# Altium PCB PCB1.PcbDoc (part 3 of 3)
Units mm, origin at the board's own origin, x right, y up, seen from the top; angles counter-clockwise.
Board outline 176 x 144.01 mm, 2 copper layers (Top Layer, Bottom Layer); 148 components, 189 nets, 767 pads, 256 vias.
Unrouted connection lines stored in the file: 30.
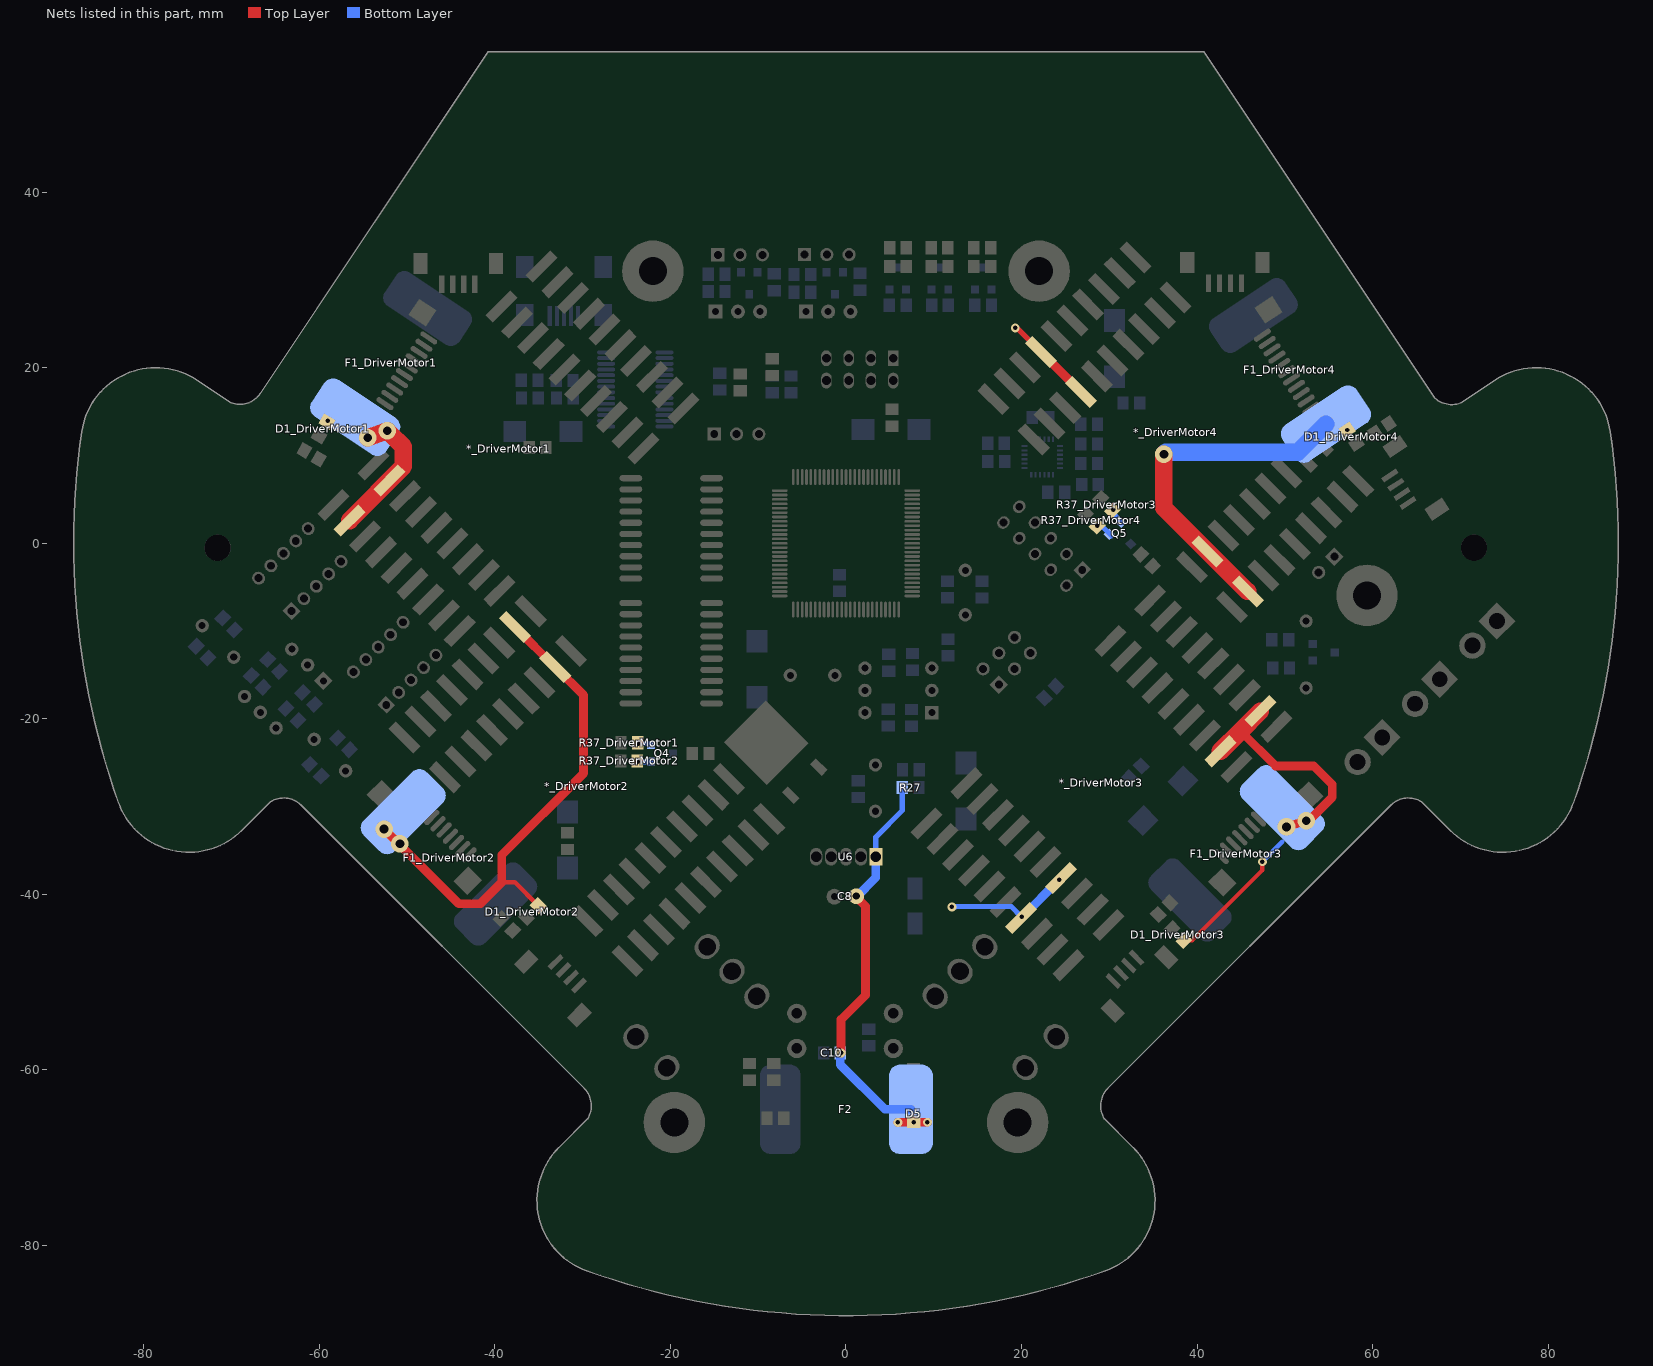
[diagram p3: the nets of this part, all layers, seen from the top]

## Via types
v1: diameter 1, hole 0.5, Top Layer to Bottom Layer, 225 vias
v2: diameter 2, hole 1, Top Layer to Bottom Layer, 17 vias
v3: diameter 1.27, hole 0.8, Top Layer to Bottom Layer, 12 vias
v4: diameter 1, hole 0.5, Top Layer to Bottom Layer, tented top, 1 vias
v5: diameter 1.27, hole 0.711, Top Layer to Bottom Layer, 1 vias

## Nets (pads, with @x,y where several pads share a name; then routed paths per layer and width w, separated by ;. In a path a pad name is that pad's centre, name@x,y a point inside that pad or via, vN(x,y) a via of type N, cw(c..) or ccw(c..) an arc to the next point about the centre after c; other vN are vias at no path point) (continued)
TWI_DATA_DriverMotor3: *_DriverMotor3.4 | length 14.9
  Bottom Layer w0.6: v1(12.065,-41.427) v1@12.471,-41.427 ; v1@12.065,-41.377 18.821,-41.377 v1(20.015,-42.57) v1@20.066,-42.57
  Bottom Layer w1: v1@20.066,-42.57 v1(24.308,-38.329)
TWI_DATA_DriverMotor4: *_DriverMotor4.4 | length 10.5
  Top Layer w0.6: v1(19.279,24.536) 19.478,24.536 *_DriverMotor4.4@22.193,21.822
  Top Layer w1: *_DriverMotor4.4@22.193,21.822 *_DriverMotor4.4@26.763,17.252
TX_DRIVER1: Q4.3 R37_DriverMotor1.2 | length 1.3
  Bottom Layer w0.5: v1(-23.688,-22.843) Q4.3@-22.416,-22.843
TX_DRIVER2: Q4.2 R37_DriverMotor2.2 | length 1.5
  Bottom Layer w0.6: v1(-23.723,-24.9) -22.238,-24.9 Q4.2@-22.211,-24.873
TX_DRIVER3: Q5.3 R37_DriverMotor3.2 | length 1.8
  Bottom Layer w0.6: v1(30.428,3.811) 30.428,3.377 Q5.3@31.405,2.399
TX_DRIVER4: Q5.2 R37_DriverMotor4.2 | length 2.1
  Bottom Layer w0.6: v1(28.632,1.979) 29.138,1.979 Q5.2@30.253,0.864
VDRIVER_DriverMotor1: *_DriverMotor1.12 D1_DriverMotor1.2 F1_DriverMotor1.1 | length 15.5
  Top Layer w2: *_DriverMotor1.12@-56.563,2.588 -56.563,2.631 -50.419,8.776 -50.419,10.998 v2@-51.968,12.548 ; v2(-54.483,12.014) v2(-52.273,12.827)
  other v1: -59.063,13.955
VDRIVER_DriverMotor2: *_DriverMotor2.12 D1_DriverMotor2.2 F1_DriverMotor2.1 | length 59.4
  Top Layer w0.5: -39.218,-38.633 -37.722,-38.633 D1_DriverMotor2.2@-35.066,-41.289
  Top Layer w1: v2(-52.629,-32.563) -44.12,-41.072 -41.656,-41.072 -39.218,-38.633 -39.218,-35.509 -29.896,-26.187 -29.896,-17.31 -33.109,-14.097 -33.152,-14.097 *_DriverMotor2.12@-37.696,-9.553
  other v2: -50.825,-34.239
VDRIVER_DriverMotor3: *_DriverMotor3.12 D1_DriverMotor3.2 F1_DriverMotor3.1 | length 43.8
  Top Layer w0.5: D1_DriverMotor3.2@38.492,-45.249 39.435,-45.249 47.447,-37.236 v1(47.447,-36.271)
  Top Layer w1: *_DriverMotor3.12@42.672,-23.711 *_DriverMotor3.12@42.672,-23.668 ; 44.955,-21.384 48.946,-25.375 53.289,-25.375 55.397,-27.483 55.397,-28.931 v2@52.502,-31.826 ; v2(50.19,-32.309) v2(52.451,-31.623)
  Top Layer w2: *_DriverMotor3.12@42.672,-23.668 44.955,-21.384 *_DriverMotor3.12@47.216,-19.124
  Bottom Layer w0.5: v1(47.447,-36.271) 49.708,-34.01
VDRIVER_DriverMotor4: *_DriverMotor4.12 D1_DriverMotor4.2 F1_DriverMotor4.1 | length 39.5
  Top Layer w2: v2(36.22,10.135) 36.22,4.051 45.73,-5.458 *_DriverMotor4.12@45.773,-5.458
  Bottom Layer w2: v2(36.22,10.135) 36.449,10.363 51.461,10.363 F1_DriverMotor4.1@54.676,13.579
  other v1: 57.106,12.906
VSS: C8.1 C10.2 D5.1 F2.1 R27.2 U6.1 | length 48.8
  Top Layer w1: v1(-0.559,-58.064) -0.559,-54.254 2.22,-51.476 2.22,-41.361 C8.1@1.168,-40.31 ; v1@5.918,-65.964 9.261,-65.964 v1(9.271,-65.954)
  Bottom Layer w0.6: U6.1@3.4,-35.712 3.4,-33.455 6.416,-30.439 R27.2@6.416,-27.838
  Bottom Layer w1: C10.2@-0.65,-58.064 -0.65,-59.395 4.445,-64.491 F2.1@7.4,-64.491 ; C8.1@1.168,-40.31 3.4,-38.078 U6.1@3.4,-35.712
  other v1: 5.918,-65.979 7.722,-65.964
pads on no net: *_DriverMotor1.6 *_DriverMotor2.6 *_DriverMotor3.6 *_DriverMotor4.6 BL1_DriverMotor1.0 BL1_DriverMotor2.0 BL1_DriverMotor3.0 BL1_DriverMotor4.0 encoder1_DriverMotor1.0 encoder1_DriverMotor2.0 encoder1_DriverMotor3.0 encoder1_DriverMotor4.0 J1.4 J1.6 J1.7 J1.8 J1.9 madarshoot1.0 P1.3 P1.4 S6.0 S6.1 S7.0 S7.1 U3.91 U3.92 U4.2 U4.3 U4.6 U4.8 U4.9 U4.10 U4.11 U4.13 U4.14 U4.19 U4.24 U4.27 U4.28 U8.2 U8.3 U8.4 U8.5 U8.6 U8.7 U8.12 U8.14 U8.15 U8.16 U8.17 U8.19 U8.21 U8.22
copper on no net: | length 0
  other v3: 13.614,9.398

## Keep-outs
Keep-Out Layer:
  lines w0.254: -75.863,-3.077 ccw(c-74.054,1.044) -70.904,4.258 ; 71.068,4.527 ccw(c73.914,1.041) 76.041,-2.924 ; -80.653,-10.366 -50.537,34.898 50.819,34.898 80.916,-10.219 21.133,-70.002 -20.985,-70.002 -80.653,-10.366

## Other copper
Top Layer:
  text "M0" at -50.648,34.061 h1 r235
  text "+" at -8.057,33.452 h0.8
  text "-" at -6.96,33.452 h0.8
  text "+" at 2.261,33.452 h0.8
  text "-" at -17.018,33.223 h0.8
  text "M3" at 51.816,32.741 h1 r125
  text "RX" at -10.185,10.338 h0.4
  text "TX" at -12.7,10.287 h0.4
  text "+" at 69.774,-4.683 h1 r45
  text "GND" at 65.278,-9.423 h0.6 r45
  text "+" at 63.221,-11.379 h1 r45
  text "GND" at 59.563,-15.342 h0.6 r45
  text "+" at 56.921,-17.983 h1 r45
  text "1" at 15.113,-20.752 h0.8
  text "GND" at 52.045,-23.266 h0.6 r45
  text "M2" at 40.208,-42.266 h1 r45
  text "M1" at -45.11,-45.491 h1 r315
  text "ON" at -31.14,-58.191 h1.5 r315
  text "Designed By:" at -4.547,-62.84 h0.9
  text "ON" at 24.409,-65.1 h1.5 r45
  text "KN2C" at -3.886,-65.583 h2.1
  text "Small Size Team" at -3.886,-66.751 h0.65

## Silkscreen, mask and mechanical layers (free items; w line width, h text height)
Top Solder:
  lines w1.8: -14.249,-64.948 -10.693,-68.504 11.024,-68.504 14.529,-64.999